# Altium PCB PCB1.PcbDoc
Units mil, origin at the board's own origin, x right, y up, seen from the top; angles counter-clockwise.
Board outline 6000 x 4000 mil, 2 copper layers (Top Layer, Bottom Layer); 28 components, 13 nets, 177 pads, 13 vias.
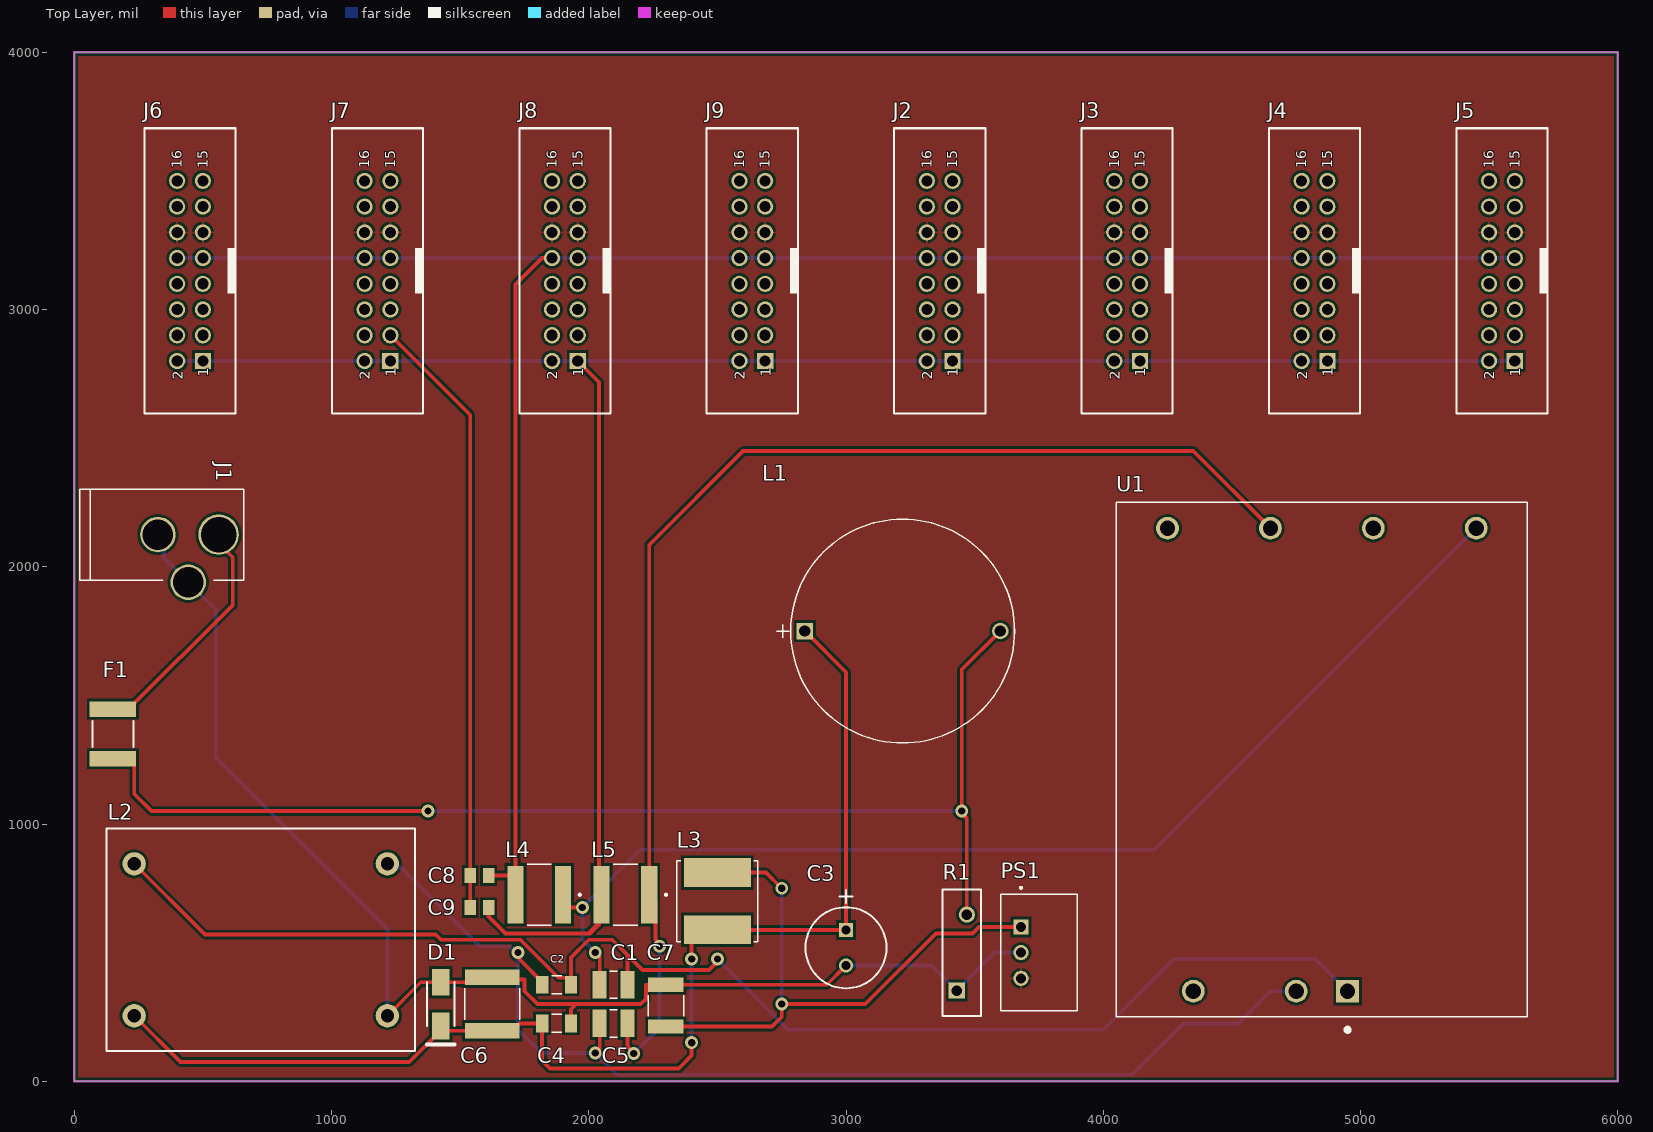
[diagram p0: Top Layer view]
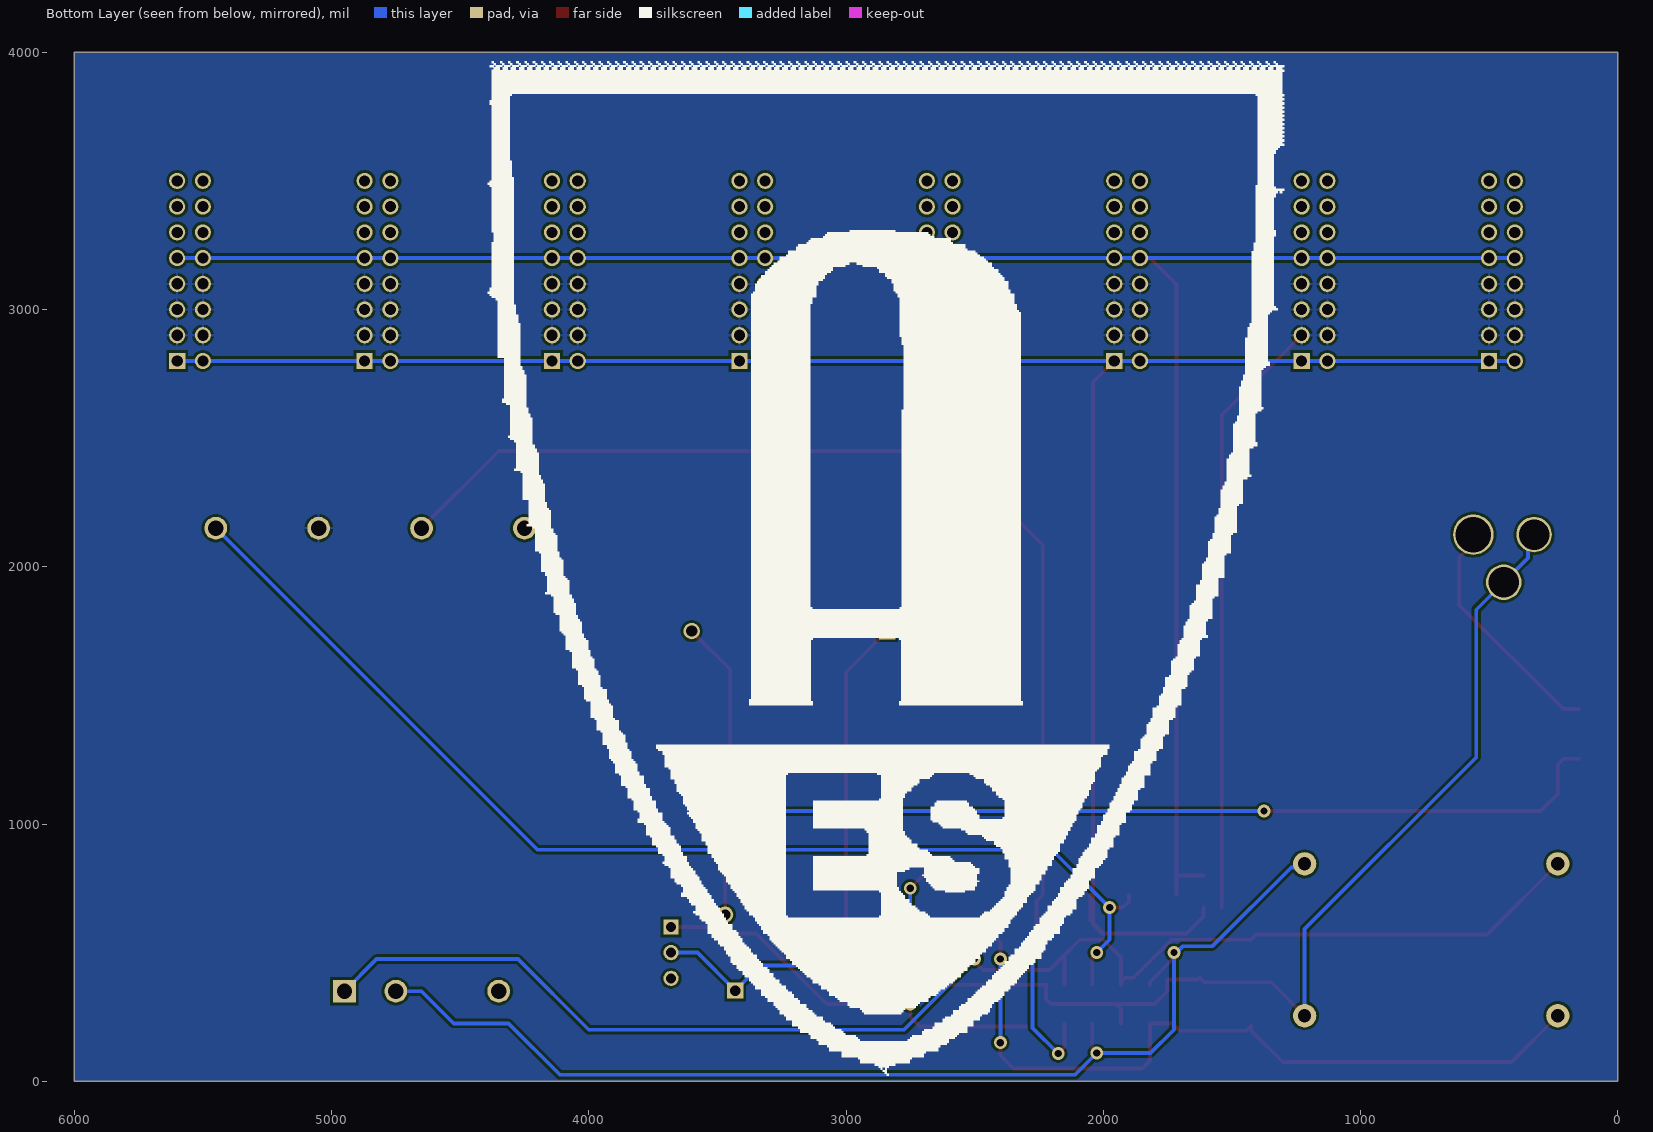
[diagram p1: Bottom Layer view, seen from below]

## Layer stack, top to bottom
Top Solder: solder mask 0.4, Solder Resist, Dk 3.5
Top Layer: signal copper 1.4
Dielectric 1: dielectric 12.6, FR-4, Dk 4.8
Bottom Layer: signal copper 1.4
Bottom Solder: solder mask 0.4, Solder Resist, Dk 3.5

## Board outline
0,0 0,4000 6000,4000 6000,0

## Design rules (kind name [scope] priority, off if disabled: settings)
Clearance [All] p1: gap=10 ignorepadtopadclearanceinfootprint=FALSE except(0: Arc-Hole Track-Hole SMDPad-Hole THPad-Hole Via-Hole Fill-Hole Poly-Hole Region-Hole Text-Hole)
Height [All] p1: minheight=0 maxheight=50000 prefheight=500
PolygonConnect [All] p1: connectstyle=Relief reliefconductorwidth=10 reliefentries=4 polygonreliefangle="90 Angle" airgapwidth=10
RoutingVias [All] p1: holewidth=28 width=50 viastyle="Through Hole" minholewidth=28 minwidth=50 maxholewidth=28 maxwidth=50
SolderMaskExpansion [All] p1: expansion=4 istentingtop=FALSE
Width [All] p1: maxlimit=20 minlimit=10 preferedwidth=15 minimp=50.000000 maximp=50.000000 favimp=50.000000
29 further rules are at their usual default settings.

## Components (designator, comment, footprint, x,y, rotation, side; value= is the part's Value field where it differs from the comment)
C1 "12101U102KAT2A" CAPC3224X140N 2096.22,375 r180 top
C2 "GMK316AB7475MLHT" CAPC3216X180N 1875,375 r0 top
C3 "B41858" CAPPR65-350-1150X800X1250 3000,518.9 r270 top
C4 "GMK316AB7475MLHT" CAPC3216X180N 1875,225 r180 top
C5 "12101U102KAT2A" CAPC3224X140N 2096.22,225 r180 top
C6 "10uF X79 100V" CAPC5750X330N 1625,300 r270 top
C7 "C1812C335K1RAC7800" CAPC4532X210N 2300,294.02 r270 top
C8 "UMK212AB7105MD-T" CAPC2013X95N 1575,800 r0 top
C9 "UMK212AB7105MD-T" CAPC2013X95N 1575,675 r180 top
D1 "SS12" FAIR-DO-214AC-2_V 1425,300 r270 top
F1 "2016L300/16MR" LFUS-2016L050MR_V 150,1350 r270 top
J1 "694106402002" DC_JACK 561.22,2125 r270 top
J2 "61201621621" 61201621621 3364.29,3150 r90 top
J3 "61201621621" 61201621621 4092.86,3150 r90 top
J4 "61201621621" 61201621621 4821.43,3150 r90 top
J5 "61201621621" 61201621621 5550,3150 r90 top
J6 "61201621621" 61201621621 450,3150 r90 top
J7 "61201621621" 61201621621 1178.57,3150 r90 top
J8 "61201621621" 61201621621 1907.14,3150 r90 top
J9 "61201621621" 61201621621 2635.71,3150 r90 top
L1 "2100LL-560-H-RC" IND_2100LL_34_H 2840,1750 r0 top
L2 "7448258022" WE-CMB-XL 725,550 r0 top
L3 "SRN8040TA-5R6M" IND_SRN8040TA-5R6M 2500,700 r90 top value=5.6uH
L4 "1264EY-150M=P3" IND_1264EY-150M=P3 1807.48,725 r180 top
L5 "1264EY-150M=P3" IND_1264EY-150M=P3 2142.52,725 r180 top
PS1 "R-785.0-0.5" CONV_R-785.0-0.5 3750,500 r270 top
R1 "MOV-10D560KTR" FP-MOV-10D201KTR-MFG 3450,500 r90 top value=600pF
U1 "PYB30-Q24-D12" CONV_PYB30-Q24-D12 4850,1250 r90 top

## Footprints (in the part's own frame and the unit in brackets; to place one, negate y for a bottom-side part, rotate by r counter-clockwise, add the part's x,y. Pads: shape width x height; smd on the part's side, far side on the other; paste and mask are expansions set on the pad)
61201621621 [mm] "16 pins, straight, gold plating"
  rect 1.6x1.6 hole 1.1: 1(-8.89,-1.27)
  round 1.6 hole 1.1: 2(-8.89,1.27) 3(-6.35,-1.27) 4(-6.35,1.27) 5(-3.81,-1.27) 6(-3.81,1.27) 7(-1.27,-1.27) 8(-1.27,1.27) 9(1.27,-1.27) 10(1.27,1.27) 11(3.81,-1.27) 12(3.81,1.27) 13(6.35,-1.27) 14(6.35,1.27) 15(8.89,-1.27) 16(8.89,1.27)
  silkscreen extent -14.09,-4.5 14.09,4.5, body extent -13.99,-4.42 13.99,4.75, height 9.13
CAPC2013X95N [mm]
  rect 1.12x1.48 smd: 1(-0.907,0) 2(0.907,0)
CAPC3216X180N [mm]
  rect 1.21x1.77 smd: 1(-1.428,0) 2(1.428,0)
  silkscreen extent -0.5,-0.88 0.5,0.88
CAPC3224X140N [mm]
  rect 1.38x2.71 smd: 1(-1.366,0) 2(1.366,0)
  silkscreen extent -0.35,-1.35 0.35,1.35
CAPC4532X210N [mm]
  rect 1.4x3.51 smd: 1(-2.057,0) 2(2.057,0)
  silkscreen extent -1.04,-1.75 1.04,1.75
CAPC5750X330N [mm]
  rect 1.53x5.41 smd: 1(-2.639,0) 2(2.639,0)
  silkscreen extent -1.55,-2.7 1.55,2.7, body extent -2.85,-2.5 2.85,2.5, height 3.3
CAPPR65-350-1150X800X1250 [mm] "THD, 2-Leads, Dia 8mm, Body 11.5mm"
  rect 1.4x1.4 hole 0.9: 1(-1.75,0)
  round 1.4 hole 0.9: 2(1.75,0)
  silkscreen extent -5.72,-4 4,4, body extent -4,-4 4,4, height 12.5
CONV_PYB30-Q24-D12 [mm]
  rect 2.25x2.25 hole 1.5: 1(-22.86,-2.54)
  round 2.25 hole 1.5: 2(-22.86,2.54) 3(-22.86,12.7) 4(22.86,15.24) 5(22.86,5.08) 6(22.86,-5.08) 7(22.86,-15.24)
  silkscreen extent -26.87,-20.3 25.4,20.3
CONV_R-785.0-0.5 [mm]
  rect 1.508x1.508 hole 1: 1(-2.54,-1.775)
  round 1.508 hole 1: 2(0,-1.775) 3(2.54,-1.775)
  silkscreen extent -6.5,-3.77 5.75,3.77
DC_JACK [mm]
  round 4 hole 3.5: 1(0,0)
  round 3.5 hole 3: 2(0,-6) 3(4.7,-3)
  silkscreen extent -4.5,-13.7 4.5,2.5
FAIR-DO-214AC-2_V [mm] "DO-214, 2-Leads, Body 4.375x2.725mm"
  rect 2.65x1.75 smd: 1(-2.15,0) 2(2.15,0)
  silkscreen extent -2.19,-1.36 3.97,1.36, body extent -2.6,-1.48 2.6,1.48, height 2.7
FP-MOV-10D201KTR-MFG [mm]
  rect 1.6x1.6 hole 1.05 paste-1000 mask+0: 1(-3.75,0.5)
  round 1.6 hole 1.05 paste-1000 mask+0: 2(3.75,-0.5)
  silkscreen extent -6.25,-1.9 6.25,1.9, body extent -6.35,-2 6.35,2, height 0.25
IND_1264EY-150M=P3 [mm]
  rect 1.6x5.7 smd: 1(-2.35,0) 2(2.35,0)
  silkscreen extent -4.1,-3 1.2,3
IND_2100LL_34_H [mil]
  rect 64x64 hole 44 mask+0: 1(0,0)
  round 64 hole 44 mask+0: 2(760,0)
  silkscreen extent -110,-435 815,435, body extent -51,-430 810,430, height 411
IND_SRN8040TA-5R6M [mm]
  rect 2.85x6.6 smd: 1(-2.825,0) 2(2.825,0)
  silkscreen extent -4,-4 4,4
LFUS-2016L050MR_V [mm] "SMD, 2-Leads, Body 5.08x4.065mm"
  rect 1.5x4.6 smd: 1(-2.45,0) 2(2.45,0)
  silkscreen extent -1.3,-2.03 1.3,2.03, body extent -2.54,-2.03 2.54,2.03, height 2
WE-CMB-XL [mm] "THT Inductor, 4-Leads, Body 30.0 x 21.0 mm"
  round 2.3 hole 1.3: 1(-12.5,-7.5) 6(12.5,-7.5) 7(12.5,7.5) 12(-12.5,7.5)
  silkscreen extent -15.25,-11 15.25,11, body extent -15,-10.5 15,10.5, height 35.13

## Part data
C1 C5: "1210 1 nF 100 V Â±10 % Tolerance SMT Ultra Low ESR RF/Microwave Capacitor", Package=None, Availability=Unavailable, MP=12101U102KAT2A, Price=None
C2 C4: "0", Package=None, Availability=Unavailable, MP=GMK316AB7475MLHT, Price=None
C3: library part CMP-1665-00041-1, "Aluminum Electrolytic Capacitor, 120uF", Case\Package=QFN, Max Operating Temperature="70 degC", Min Operating Temperature="-20 degC", Nominal Supply Voltage="3.3 V", Package Quantity=500, ComponentLink1Description=Digikey, ComponentLink1URL=https://www.digikey.com/en/products/detail/epcos-tdk-electronics/B41858C7127M000/3543602, Data Rate="54 mbps", DatasheetVersion=Mar-16, Length="7.7 mm", Mount="Surface Mount", PackageDescription="2-Pin Radial Lead, Dia 8 mm, Body Length 11.5 mm", PackageReference=CAPPR65-350-1150X800X1250, Packaging="Tape and Reel", Pins=48, Radiation Hardening=No, RoHSCompliant=true
C6: library part C1812C335K1RAC7800, Package=None, Availability=Unavailable, MP=C1812C335K1RAC7800, Price=None
C7: Package=None, Availability=Unavailable, MP=C1812C335K1RAC7800, Price=None
C8 C9: "CAP ,MLCC ,0805,50V ,X7R,1.0UF20% ,T&R", Package=None, Availability=Unavailable, MP=UMK212AB7105MD-T, Price=None
D1: library part CMP-004-00016-2, "Schottky Rectifier, 20 V, 1 A, -65 to 125 degC, 2-Pin DO-214AC, RoHS, Tape and Reel", Case/Package=SMA, Forward Voltage=500mV, Manufacturer=Fairchild, Max Operating Temperature=125°C, Max Surge Current=40A, Min Operating Temperature=-65°C, Package Description="2-Pin Surface Mount Device, Body 4.375 x 2.725 mm", Package Quantity=7500, Package Reference=DO-214AC-2, Peak Reverse Current=200uA, Datasheet URL=https://www.fairchildsemi.com/datasheets/SS/SS12.pdf, Datasheet Version="Rev. 1.9, 01/2015", Manufacturer URL=https://www.fairchildsemi.com/, Mounting Technology=SM, Package URL=https://www.fairchildsemi.com/package-drawings/DO/DO214AC.pdf, Packaging=TapeandReel, Pins=2, RoHS Compliant=True
F1: library part CMP-2000-05524-1, "Poly-Fuse(R) Resettable PTC, 60 V, 20 A, -40 to 85 degC, 2-Pin SMD, RoHS, Tape and Reel", Current Rating=20A, Hold Current=0.55A, Manufacturer=Littelfuse, Maximum Voltage=60VDC, Maximum Voltage DC=60V, Operating Temperature Range=-40Cto+85C, Package / Case=2016(5041metric), Package Description="2-Pin Surface Mount Device, Body 5.08 x 4.065 mm", Package Reference=2016L050MR, Resistance=1Ohms, Trip Current=1.1A, Brand=Littelfuse, Current Rating (Max)=20A, Current Rating - Max=20A, Datasheet URL=http://www.littelfuse.com/~/media/electronics/datasheets/resettable_ptcs/littelfuse_ptc_2016l_datasheet.pdf.pdf, Datasheet Version=08/2016, Dimensions=4.72mmLx3.7mmWx1.2mmH, Factory Pack Quantity=1000, Manufacturer URL=http://www.littelfuse.com/, Mounting Style=SMD/SMT, Mounting Technology=SurfaceMount, Packaging=Reel, Product Category=ResettableFuses-PPTC, RoHS=Details, Series=2016L, Termination Style=SMD/SMT, Type=PolyFuseResettablePTC
J1: "No Description Available", Mfr_Name="Wurth Electronics", Copyright="Copyright (C) 2022 Ultra Librarian. All rights reserved.", Digi-Key_Part_Number_1=732-5931-ND, Manufacturer_Part_Number=694106402002, RefDes=RefDes, Type=DEV
J2 J3 J4 J5 J6 J7 J8 J9: library part CMP-1502-00009-1, "Male Box Header WR-BHD, THT, Vertical, pitch 2.54 mm, 16 pins", Contact Resistance=20mOhm, Manufacturer="Wurth Elektronik", Operating Temperature=-40to125degC, Withstanding Voltage=500VAC, Working Voltage=250VAC, Datasheet URL=https://katalog.we-online.de/em/datasheet/6120xx21621.pdf, Gender=Male, Manufacturer URL=http://www.we-online.de, Mounting Technology=THT, Orientation=Vertical, Package Reference=61201621621, Packaging=Tray, Part Number=61201621621, Pin Number=16, Pitch=2.54mm, Published Date=August2018, Publisher=WurthElektronik
L1: "No Description Available", Mfr_Name="Bourns Electronics", Copyright="Copyright (C) 2022 Ultra Librarian. All rights reserved.", Digi-Key_Part_Number_1=M1409-ND, Manufacturer_Part_Number=2100LL-560-H-RC, RefDes=RefDes, Type=DEV
L2: library part CMP-0223-00067-1, "THT Common Mode Power Line Choke WE-CMB, L = 2.20 mH", Inductance="2.20 mH", ComponentLink1Description="Manufacturer Link", ComponentLink1URL=http://www.we-online.com, ComponentLink2Description=Datasheet, ComponentLink2URL=http://www.we-online.de/katalog/media/pdf/7448258022.pdf, DatasheetVersion="ver 4, Oct-2004", PackageDescription="THT Inductor, 4-Leads, Body 30.0 x 21.0 mm", PackageReference=WE-CMB-XL, PackageVersion=2004
L3: "Inductor Power Semi-Shielded Wirewound 150uH 20% 1MHz 10Q-Factor Ferrite 980mA 410mOhm DCR 3131 Automotive T/R", Package=None, Availability=Unavailable, MP=SRN8040TA-5R6M, Price=None
L4 L5: "Inductor Power Shielded Wirewound 22uH 20% 100KHz Ferrite 1.8A 132mOhm DCR 2424 T/R", Package=None, Availability=Unavailable, MP=1264EY-150M=P3, Price=None
PS1: "0.5A DC/DC-Converter 'INNOLINE' SIP3 reg", Package="SIP-3 Recom Power", Availability=Unavailable, MF="Recom Power", MP=R-785.0-0.5, Price=None, SnapEDA_Link=https://www.snapeda.com/parts/R-785.0-0.5/Recom%20Power/view-part/331228/?ref=snap
R1: library part CMP-07402-000009-1, "VARISTOR 200V 2.5KA DISC 10MM", Capacitance=600pF, Clamping Current=25A, Clamping Voltage=340V, Manufacturer="Bourns Inc.", Manufacturer Part Number=MOV-10D201KTR, Package=0, Temperature="-40°C to +105°C", Temperature Range High=+105°C, Temperature Range Low=-40°C, Varistor Voltage=185V, Voltage Rating Ac=130V, Voltage Rating Dc=170V, Voltage Tolerance=10%, Automotive=No, Category=Res, ComponentLink2Description=Datasheet, ComponentLink2URL=https://www.bourns.com/docs/Product-Datasheets/MOV10D.pdf, Device Class L1="Circuit Protection", Device Class L2=Varistors, Device Class L3=unset, Digikey Description="VARISTOR 200V 2.5KA DISC 10MM", Height=15.5mm, Lead Free=Yes, Mouser Description="Varistors 250pF 200volts 10%", Octopart=https://octopart.com/mov-10d201ktr-bourns-19184757, RoHS=TRUE
U1: "12/-12 Vdc, 1.25 A, 30 W, 9~36 Vdc Input Range", Package=None, Supplier Part Number 1=102-2940-ND, Availability=Unavailable, MP=PYB30-Q24-D12, Price=None, Supplier 1=Digi-Key

## Via types
v1: diameter 50, hole 28, Top Layer to Bottom Layer, 13 vias

## Nets (pads, with @x,y where several pads share a name; then routed paths per layer and width w, separated by ;. In a path a pad name is that pad's centre, name@x,y a point inside that pad or via, vN(x,y) a via of type N, cw(c..) or ccw(c..) an arc to the next point about the centre after c; other vN are vias at no path point)
+5: J2.11 J2.12 J3.11 J3.12 J4.11 J4.12 J5.11 J5.12 J6.11 J6.12 J7.11 J7.12 J8.11 J8.12 J9.11 J9.12 PS1.3
+12: C8.2 J2.9 J2.10 J3.9 J3.10 J4.9 J4.10 J5.9 J5.10 J6.9 J6.10 J7.9 J7.10 J8.9 J8.10 J9.9 J9.10 L4.2 | length 7861.1
  Top Layer w15: C8.2 L4.2@1714.96,800 ; L4.2 L4.2@1714.96,800 ; J8.10 1818,3200 1714.96,3096.96 L4.2@1714.96,800
  Bottom Layer w15: J6.10 J6.9 J7.10 J7.9 J8.10 J8.9 J9.10 J9.9 J2.10 J2.9 J3.10 J3.9 J4.10 J4.9 J5.10 J5.9
+15: F1.1 J1.1 | length 931.1
  Top Layer w15: F1.1 211.02,1446.46 614.57,1850 616.21,1850 616.21,2036.82 561.22,2091.81 J1.1
-12: C9.1 J2.1 J2.2 J3.1 J3.2 J4.1 J4.2 J5.1 J5.2 J6.1 J6.2 J7.1 J7.2 J8.1 J8.2 J9.1 J9.2 L5.2 | length 8423.8
  Top Layer w15: C9.1 1610.71,640 1675.71,575 ; J8.1 2039.96,2717.18 2039.96,610 2004.96,575 1675.71,575 ; L5.2 2050,627 1998,575 1675.71,575
  Bottom Layer w15: J6.2 J6.1 J7.2 J7.1 J8.2 J8.1 J9.2 J9.1 J2.2 J2.1 J3.2 J3.1 J4.2 J4.1 J5.2 J5.1
COM: C8.1 C9.2 J2.3 J2.4 J2.5 J2.6 J2.7 J2.8 J3.3 J3.4 J3.5 J3.6 J3.7 J3.8 J4.3 J4.4 J4.5 J4.6 J4.7 J4.8 J5.3 J5.4 J5.5 J5.6 J5.7 J5.8 J6.3 J6.4 J6.5 J6.6 J6.7 J6.8 J7.3 J7.4 J7.5 J7.6 J7.7 J7.8 J8.3 J8.4 J8.5 J8.6 J8.7 J8.8 J9.3 J9.4 J9.5 J9.6 J9.7 J9.8 U1.6 | length 2354.1
  Top Layer w15: J7.3 1539.29,2589.28 C8.1 1539,799.71 1539,682 1539.29,682 C9.2
GND1: C3.2 C4.1 C6.1 C7.1 D1.1 J1.2 J1.3 L2.6 PS1.2 R1.1 | length 5113.3
  Top Layer w15: L2.6 1347.05,384.65 D1.1 1605.75,384.65 C6.1 1633.79,395.11 1750,395.11 1750,350 1800,300 1951.22,300 ; C4.1 1931.22,280 1951.22,300 ; C3.2 2925,375 C7.1 2222,375 2222,320 2202,300 1951.22,300
  Bottom Layer w15: J1.2 348.5,2101.5 348.5,2034.58 J1.3 550,1833.07 550,1575 550,1258.65 1217.13,591.52 L2.6 ; C3.2 3332.68,450 R1.1 3577.95,500 PS1.2
NetC1_1: C1.1 C2.2 L2.12 U1.1 | length 5509.7
  Top Layer w15: L2.12 508.15,570 1405,570 1425,550 1735.1,550 1882.76,402.34 1914.9,402.34 C2.2@1931.22,386.02 ; C2.2 C2.2@1931.22,386.02 ; C1.1 2150,491.21 ; v1(2500,475) 2500,465.53 2466.97,432.5 2208.71,432.5 2150,491.21 ; C2.2@1931.22,386.02 1931.22,481.22 2000,550 2091.21,550 2150,491.21
  Bottom Layer w15: v1(2500,475) 2775,200 4000,200 4275,475 4825,475 U1.1
NetC2_1: C2.1 C5.2 L2.7 U1.2 | length 4469.6
  Top Layer w15: v1(1725,500) 1731.7,493.3 1731.7,473.11 1818.78,386.02 C2.1 ; v1(2025,109.47) 2042.44,126.91 C5.2
  Bottom Layer w15: L2.7 1231.25,831.15 1268.85,831.15 1575,525 1690.53,525 1715.53,500 v1(1725,500) 1725,200 1815.53,109.47 v1(2025,109.47) 2109.47,25 4112.39,25 4312.39,225 4525,225 4650,350 U1.2
NetC3_1: C3.1 C4.2 C6.2 D1.2 L1.1 L2.1 L3.1 | length 4796.6
  Top Layer w15: L2.1 412.6,75 1302.36,75 1425,197.64 D1.2 1444.25,196.1 C6.2 1701.38,196.1 1730.28,225 C4.2 1818.78,81.22 1850,50 2350,50 2400,100 v1(2400,150) ; v1(2400,475) 2400,540.18 2448.6,588.78 L3.1 2500.98,587.8 C3.1 3000,1590 L1.1
  Bottom Layer w15: v1(2400,150) v1(2400,475)
NetC7_2: C7.2 L3.2 PS1.1 | length 2295.1
  Top Layer w15: C7.2 2713.03,213.03 2750,250 v1(2750,300) 3075,300 3350,575 3491.47,575 3516.47,600 PS1.1 ; L3.2 2688.78,811.22 v1(2750,750)
  Bottom Layer w15: v1(2750,300) v1(2750,750)
NetF1_2: F1.2 L1.2 R1.2 | length 4624.1
  Top Layer w15: F1.2 211.02,1253.54 233.05,1231.52 233.05,1116.95 300,1050 v1(1375,1050) ; R1.2 3469.69,1020.84 3450,1040.53 v1(3450,1050) 3450,1600 L1.2
  Bottom Layer w15: v1(1375,1050) v1(3450,1050)
OUTFILT+: C1.2 L4.1 U1.7 | length 4524.8
  Top Layer w15: L4.1 1900,699 1924,675 v1(1975,675) ; v1(2025,500) 2042.44,482.56 C1.2
  Bottom Layer w15: v1(2025,500) 1975,550 v1(1975,675) 2200,900 4200,900 U1.7
OUTFILT-: C5.1 L5.1 U1.5 | length 4853.8
  Top Layer w15: C5.1 2150,134.47 2175,109.47 v1(2175,107.5) ; v1(2275,525) 2275,534.47 2259.04,550.43 2259.04,701 L5.1 2235.04,2085.04 2600,2450 4350,2450 U1.5
  Bottom Layer w15: v1(2175,107.5) 2275,207.5 v1(2275,525)
pads on no net: J2.13 J2.14 J2.15 J2.16 J3.13 J3.14 J3.15 J3.16 J4.13 J4.14 J4.15 J4.16 J5.13 J5.14 J5.15 J5.16 J6.13 J6.14 J6.15 J6.16 J7.13 J7.14 J7.15 J7.16 J8.13 J8.14 J8.15 J8.16 J9.13 J9.14 J9.15 J9.16 U1.3 U1.4

## Polygon pours and split planes (outlines as drawn)
+5 on Top Layer "+5_L01_P000" (solid, pour order 0): 0,0 0,4000 6000,4000 6000,0
COM on Bottom Layer "COM_L01_P001" (solid, pour order 1): 0,0 0,4000 6000,4000 6000,0

## Keep-outs
Top Layer:
  the board outline again, w10

## Silkscreen, mask and mechanical layers (free items; w line width, h text height)
Bottom Overlay:
  drawing of 3 lines, arcs and shapes, not listed

## Text inside footprints (layer, text, board x,y; h text height)
J2: Top Overlay "15" at 3432.79,3549.61 h40 r90; Top Overlay "16" at 3332.79,3549.61 h40 r90; Top Overlay "2" at 3335.15,2726.77 h40 r90; Top Overlay "1" at 3435.15,2738.58 h40 r90
J3: Top Overlay "15" at 4161.36,3549.61 h40 r90; Top Overlay "16" at 4061.36,3549.61 h40 r90; Top Overlay "2" at 4063.72,2726.77 h40 r90; Top Overlay "1" at 4163.72,2738.58 h40 r90
J4: Top Overlay "15" at 4889.93,3549.61 h40 r90; Top Overlay "16" at 4789.93,3549.61 h40 r90; Top Overlay "2" at 4792.29,2726.77 h40 r90; Top Overlay "1" at 4892.29,2738.58 h40 r90
J5: Top Overlay "15" at 5618.5,3549.61 h40 r90; Top Overlay "16" at 5518.5,3549.61 h40 r90; Top Overlay "2" at 5520.87,2726.77 h40 r90; Top Overlay "1" at 5620.87,2738.58 h40 r90
J6: Top Overlay "1" at 520.87,2738.58 h40 r90; Top Overlay "2" at 420.87,2726.77 h40 r90; Top Overlay "16" at 418.5,3549.61 h40 r90; Top Overlay "15" at 518.5,3549.61 h40 r90
J7: Top Overlay "15" at 1247.08,3549.61 h40 r90; Top Overlay "16" at 1147.08,3549.61 h40 r90; Top Overlay "2" at 1149.44,2726.77 h40 r90; Top Overlay "1" at 1249.44,2738.58 h40 r90
J8: Top Overlay "15" at 1975.65,3549.61 h40 r90; Top Overlay "16" at 1875.65,3549.61 h40 r90; Top Overlay "2" at 1878.01,2726.77 h40 r90; Top Overlay "1" at 1978.01,2738.58 h40 r90
J9: Top Overlay "15" at 2704.22,3549.61 h40 r90; Top Overlay "16" at 2604.22,3549.61 h40 r90; Top Overlay "2" at 2606.58,2726.77 h40 r90; Top Overlay "1" at 2706.58,2738.58 h40 r90